# Altium PCB Knobber.PcbDoc
Units mm, origin at the board's own origin, x right, y up, seen from the top; angles counter-clockwise.
Board outline 32 x 31.45 mm, 4 copper layers (Top Layer, MidLayer1, MidLayer2, Bottom Layer), stack 1.57 mm thick; 60 components, 43 nets, 247 pads, 88 vias.
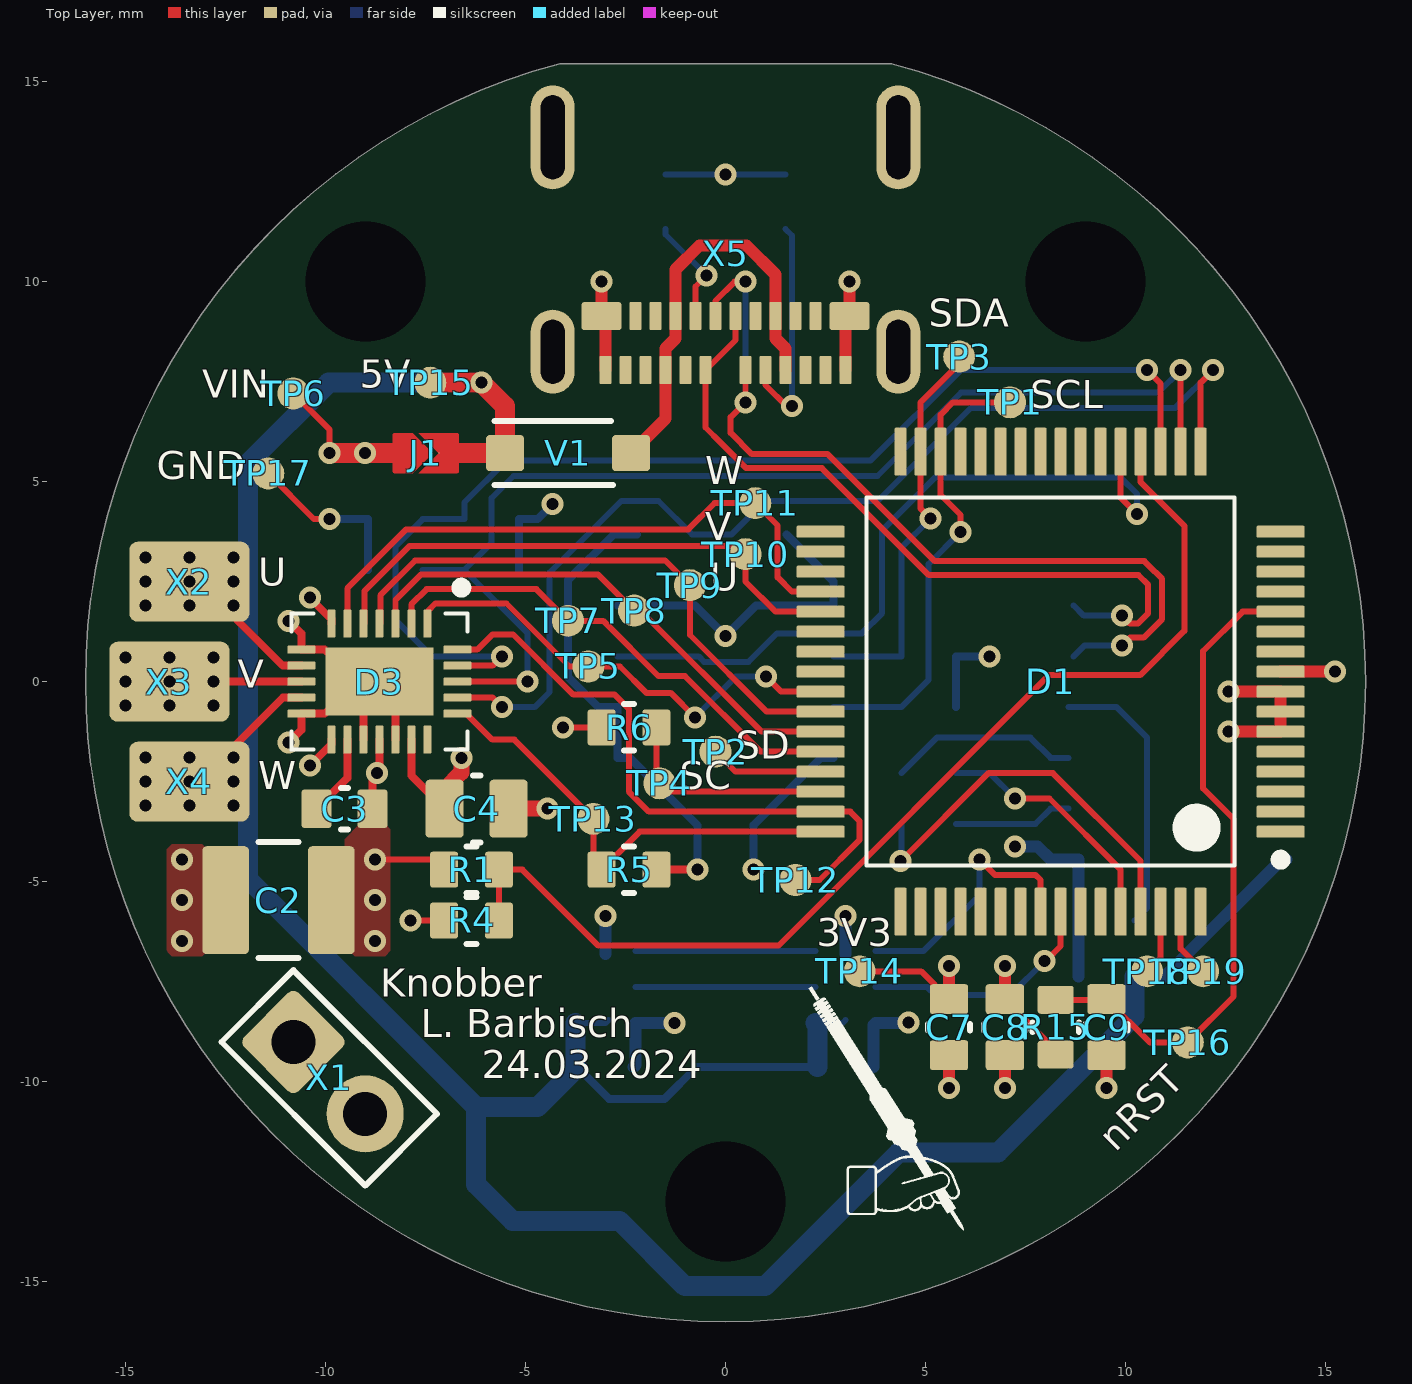
[diagram p0: Top Layer view]
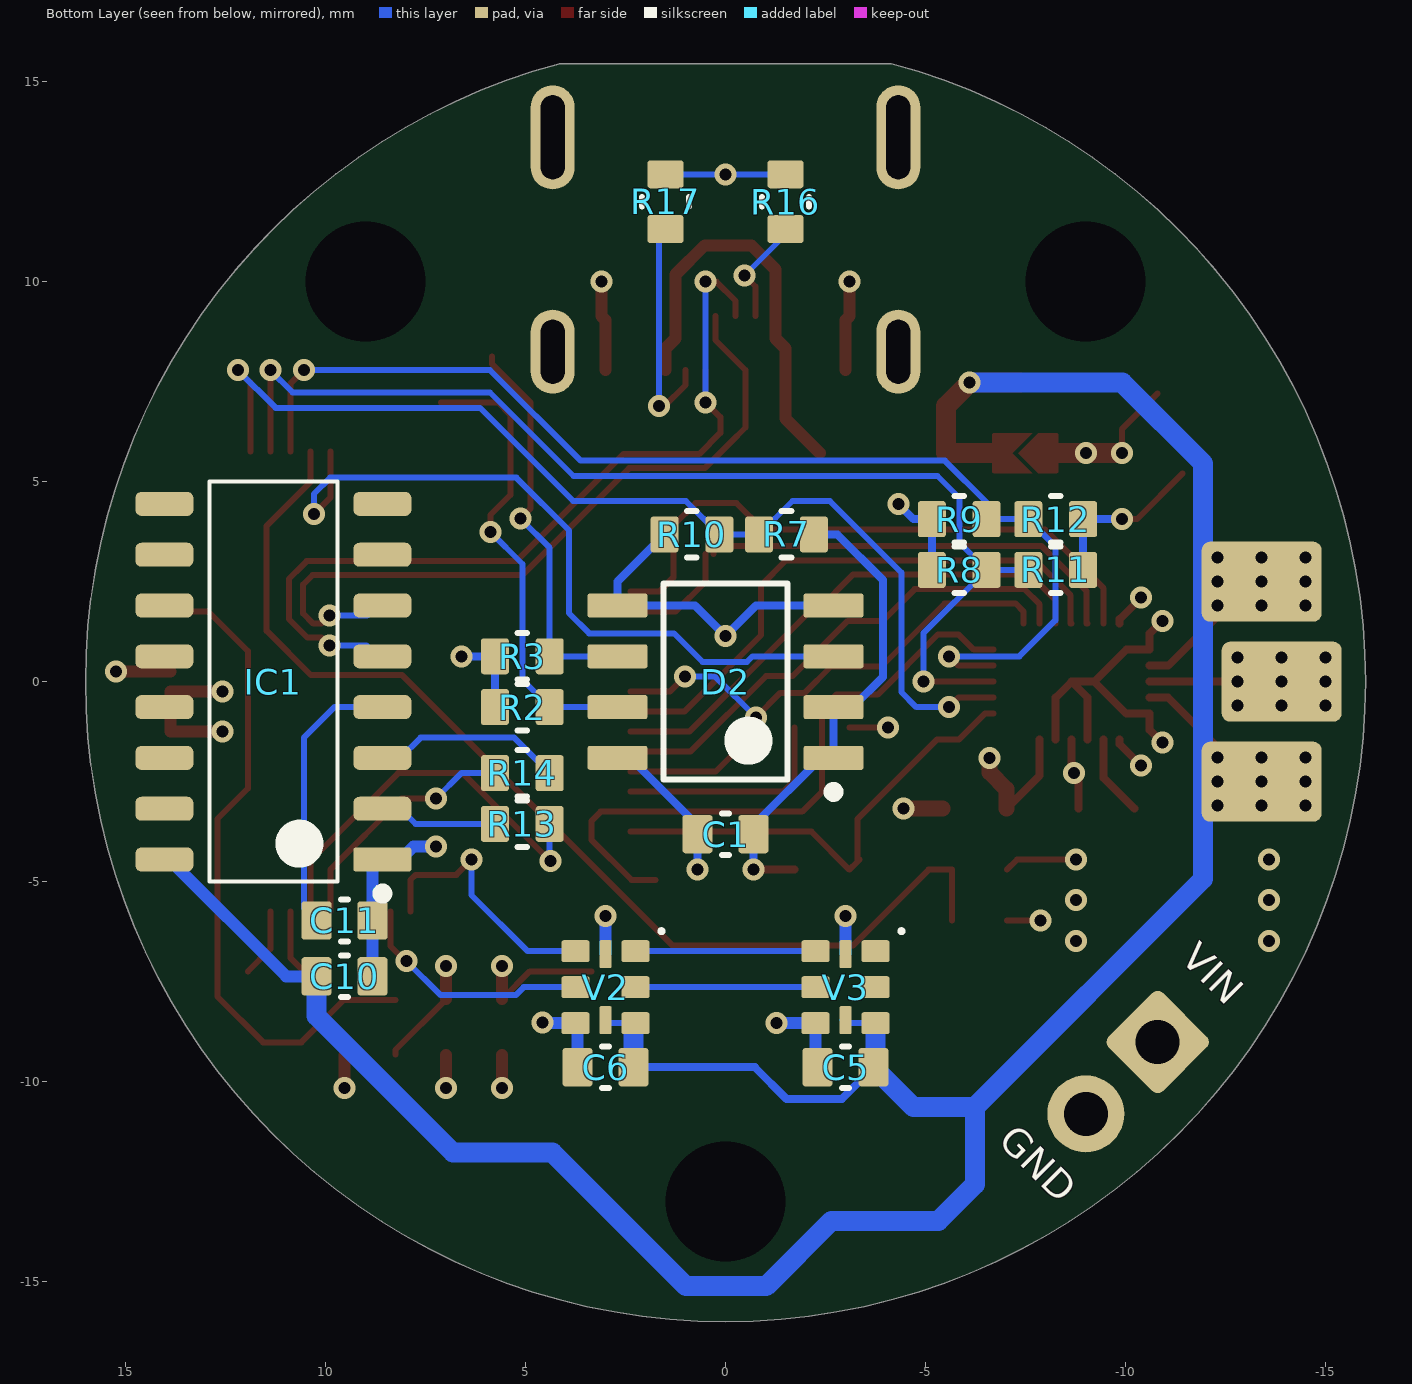
[diagram p1: Bottom Layer view, seen from below]
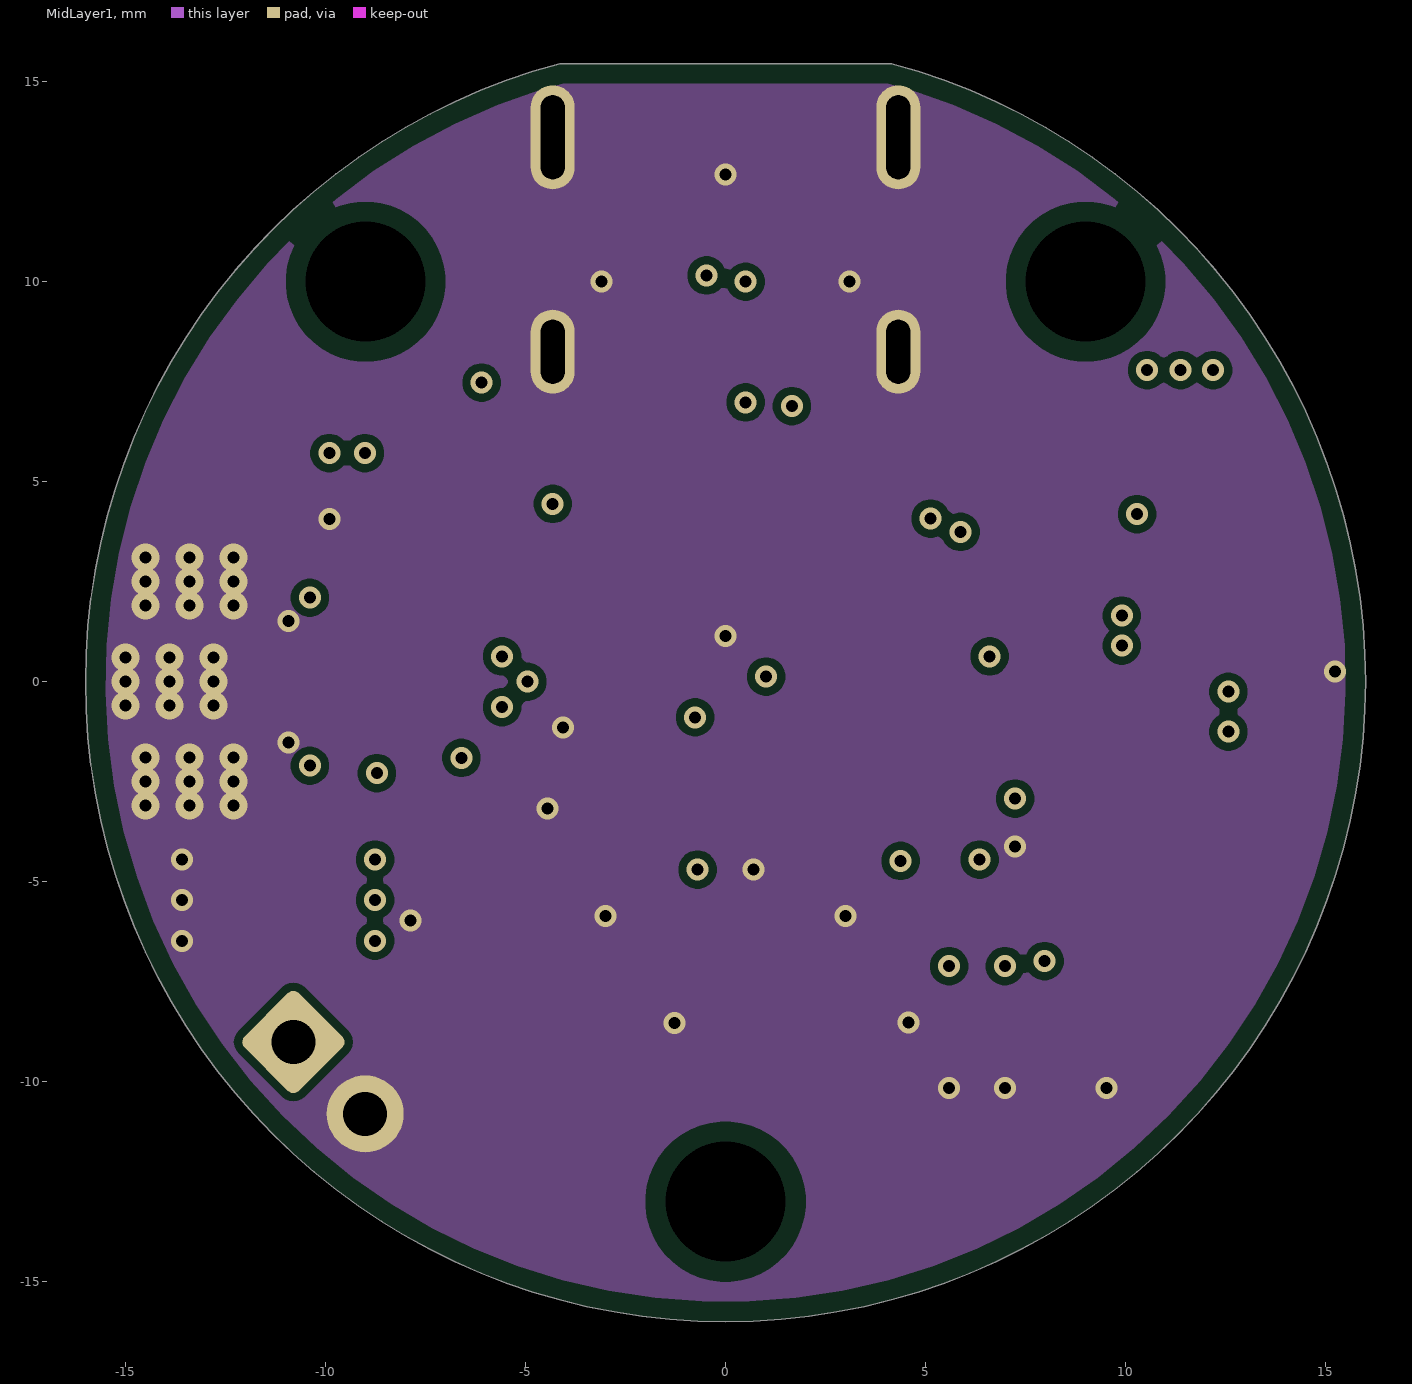
[diagram p2: MidLayer1]
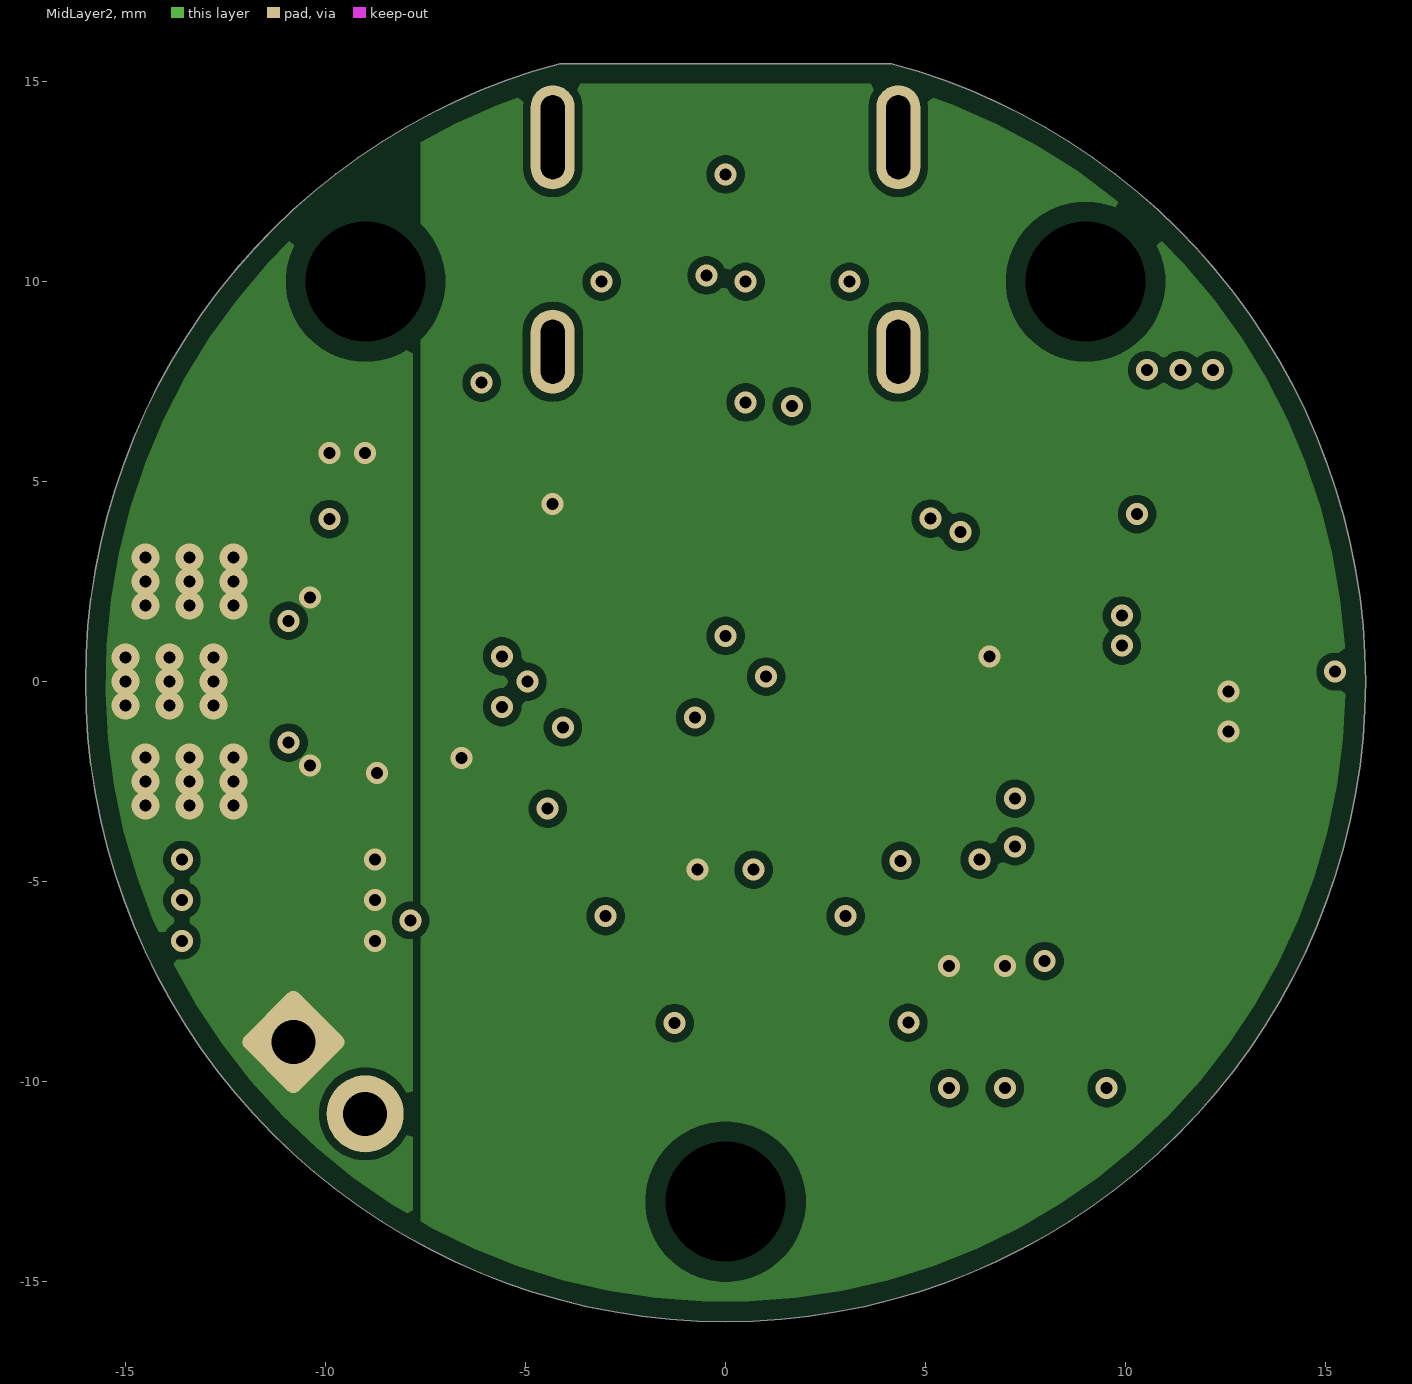
[diagram p3: MidLayer2]

## Layer stack, top to bottom
Top Solder: solder mask 0.01, Solder Resist, Dk 3.5
Top Layer: signal copper 0.035
Dielectric1: prepreg 0.18, FR-4 (7628), Dk 4.2
Dielectric 2: prepreg 0.18, FR-4 (7628), Dk 4.2
MidLayer1: signal copper 0.035
Core: core 0.71, Dk 4.2
MidLayer2: signal copper 0.035
Dielectric 3: prepreg 0.18, FR-4 (7628), Dk 4.2
Dielectric 4: prepreg 0.18, FR-4 (7628), Dk 4.2
Bottom Layer: signal copper 0.035
Bottom Solder: solder mask 0.01, Solder Resist, Dk 3.5

## Board outline
-4.141,15.455 ccw(c0,0) 4.141,15.455

## Design rules (kind name [scope] priority, off if disabled: settings)
AssemblyTestPointUsage [IsTestpoint] p1:
AssemblyTestpoint [IsTestpoint] p1 off: testpointundercomponent=TRUE minsize=0.8 maxsize=1.6 preferedsize=0.85 minholesize=0 maxholesize=0 preferedholesize=0 testpointgrid=0.025 usegrid=FALSE gridtolerance=0 allowsidetop=TRUE allowsidebottom=TRUE minspacing=2.54
BoardOutlineClearance [All and not OnLayer('Top Overlay')] p1: gap=0.5 ignorepadtopadclearanceinfootprint=FALSE except(0: Arc-SplitContinuation Track-SplitContinuation SMDPad-SplitContinuation Fill-SplitContinuation Poly-SplitContinuation Region-SplitContinuation Text-SplitContinuation; 1.5: THPad-SplitContinuation Via-SplitContinuation)
Clearance Clearance_NetClasses [InNetClass('PrimarySide') vs InNetClass('SecondarySide')] p1: gap=1 ignorepadtopadclearanceinfootprint=FALSE except(0: Arc-Hole Track-Hole SMDPad-Hole THPad-Hole Via-Hole Fill-Hole Poly-Hole Region-Hole Text-Hole)
Clearance Clearance_Pri-PE [InNetClass('PrimarySide') vs InNet('EARTH') or InNet('EARTH_G2') or InNet('EARTH_USB') or InNet('NetC3_2')] p2: gap=1 ignorepadtopadclearanceinfootprint=FALSE except(0: Arc-Hole Track-Hole SMDPad-Hole THPad-Hole Via-Hole Fill-Hole Poly-Hole Region-Hole Text-Hole)
Clearance Clearance_Sec-PE [InNetClass('SecondarySide') vs InNet('EARTH') or InNet('EARTH_G2') or InNet('EARTH_USB') or InNet('NetC3_2')] p3: gap=0.5 ignorepadtopadclearanceinfootprint=FALSE except(0: Arc-Hole Track-Hole SMDPad-Hole THPad-Hole Via-Hole Fill-Hole Poly-Hole Region-Hole Text-Hole)
Clearance Clearance_KeepOut [OnLayer('Keep-Out Layer')] p4: gap=0.5 ignorepadtopadclearanceinfootprint=FALSE except(0: Arc-Hole Track-Hole SMDPad-Hole THPad-Hole Via-Hole Fill-Hole Poly-Hole Region-Hole Text-Hole)
Clearance Clearance2Holes [not OnTopLayer AND NOT OnBottomLayer vs (ObjectKind = 'Pad') And (Layer = 'MultiLayer') And (PadIsPlated = 'False')] p5: gap=0.5 ignorepadtopadclearanceinfootprint=FALSE except(0: Arc-Hole Track-Hole SMDPad-Hole THPad-Hole Via-Hole Fill-Hole Poly-Hole Region-Hole Text-Hole)
Clearance Clearance_via2via [IsVia vs IsVia] p6: gap=0.15 ignorepadtopadclearanceinfootprint=FALSE
Clearance [All] p7: gap=0.2 ignorepadtopadclearanceinfootprint=FALSE except(0: Arc-Hole Track-Hole SMDPad-Hole THPad-Hole Via-Hole Fill-Hole Poly-Hole Region-Hole Text-Hole)
ComponentClearance [IsComponent] p1: gap=0.254 collisioncheckmode=3 verticalgap=0.254 showdistances=TRUE donotcheckwithout3dbody=TRUE
DiffPairsRouting [All] p1: maxlimit=0.254 minlimit=0.2 mostfreqgap=0.254 toplayer_minwidth=0.15 toplayer_maxwidth=0.381 toplayer_prefwidth=0.381 midlayer1_minwidth=0.15 midlayer1_maxwidth=0.381 midlayer1_prefwidth=0.381 midlayer2_minwidth=0.15 midlayer2_maxwidth=0.381 midlayer2_prefwidth=0.381 bottomlayer_minwidth=0.15 bottomlayer_maxwidth=0.381 bottomlayer_prefwidth=0.381 maxuncoupledlength=12.7
FabricationTestPointUsage [IsTestpoint] p1: valid=0 allowmultiple=FALSE
FabricationTestpoint [IsTestpoint] p1 off: side=3 testpointundercomponent=TRUE minsize=0.8 maxsize=1.6 preferedsize=0.85 minholesize=0 maxholesize=0 preferedholesize=0 testpointgrid=0.025 allowsidetop=TRUE allowsidebottom=TRUE usegrid=FALSE gridtolerance=0 minspacing=2.54 boardedgeclearance=1.9
HoleSize [All] p1: absolutevalues=TRUE maxlimit=6.4 minlimit=0.2 maxpercent=80.000 minpercent=20.000
MinimumAnnularRing MinimumAnnularRingVia [IsVia] p1: minimumring=0.12
MinimumAnnularRing MinimumAnnularRingDefault [All] p2: minimumring=0.15
MinimumSolderMaskSliver MinimumSolderMaskSliver_Symbols [IsComponent] p1: minsoldermaskwidth=0
MinimumSolderMaskSliver [All] p2: minsoldermaskwidth=0.1
PlaneClearance PlaneClearance_PE [InNet('EARTH_USB')  or InNet('EARTH_G2') or InNet('NetC3_2') or InNet('EARTH')] p1: clearance=1
PlaneClearance PlaneClearance_Holes-via [(IsVia)] p2: clearance=0.35
PlaneClearance PlaneClearance_Holes-Special [(InComponentClass('SpecialConnector'))] p3: clearance=0.35
PlaneClearance [All] p4: clearance=0.5
PlaneConnect "PlaneConnect_Special Con" [(InComponentClass('SpecialConnector'))] p1: planeconnectstyle=Direct reliefexpansion=0.508 reliefentries=4 reliefconductorwidth=0.254 reliefairgap=0.254
PlaneConnect PlaneConnect_Components [(InComponentClass('All Components'))] p2: planeconnectstyle=Relief reliefexpansion=0.35 reliefentries=4 reliefconductorwidth=0.25 reliefairgap=0.25
PlaneConnect [All] p3: planeconnectstyle=Direct reliefexpansion=0.508 reliefentries=4 reliefconductorwidth=0.254 reliefairgap=0.254
PolygonConnect PolygonConnect_Components [(InComponentClass('All Components'))] p1: connectstyle=Direct reliefconductorwidth=0.254 reliefentries=4 polygonreliefangle="90 Angle" airgapwidth=0.254
PolygonConnect [All] p2: connectstyle=Direct reliefconductorwidth=0.254 reliefentries=4 polygonreliefangle="90 Angle" airgapwidth=0.254
RoutingVias Micro-Vias [((ObjectKind = 'Via') AND (StartLayer = 'Top Layer') AND (StopLayer = 'InternalPlane1')) OR ((ObjectKind = 'Via') AND (StartLayer = 'Bottom Layer') AND (StopLayer = 'InternalPlane2'))] p1: holewidth=0.15 width=0.35 viastyle="Through Hole" minholewidth=0.15 minwidth=0.35 maxholewidth=0.15 maxwidth=0.35
RoutingVias [All] p2: holewidth=0.2 width=0.55 viastyle="Through Hole" minholewidth=0.2 minwidth=0.55 maxholewidth=0.3 maxwidth=0.7 useviatemplates=TRUE viatemplateguid#1={409902A1-507B-49B3-8F71-9776A71DEEE2} viatemplatename#1=v55h30m0mx0
SilkToSilkClearance [All] p1: silktosilkclearance=0.2
SilkToSolderMaskClearance SilkToPadClearance [IsPad] p1: minsilkscreentomaskgap=0.2 clearancetoexposedcopper=TRUE
SolderMaskExpansion SolderMaskExpansionVias [IsVia] p1: expansion=0.15 istentingtop=FALSE soldermaskfromhole=TRUE
SolderMaskExpansion SolderMaskExpansionHoles [(ObjectKind = 'Pad') And (PadIsPlated = 'False') And (AsMM(PadXSize_AllLayers) = 0) And (AsMM(PadYSize_AllLayers) = 0)] p2: expansion=0.05 istentingtop=FALSE soldermaskfromhole=TRUE
SolderMaskExpansion SolderMaskExpansionSTD [IsPad  Or IsRegion] p3: expansion=0.05 istentingtop=FALSE
ViasUnderSMD ViasUnderSMD_TP [HasFootprint('TP_1.0mm')] p1: allowed=TRUE
ViasUnderSMD [All] p2: allowed=FALSE
Width [All] p1: maxlimit=2 minlimit=0.15 preferedwidth=0.2 minimp=50.000000 maximp=50.000000 favimp=50.000000
18 further rules are at their usual default settings.

## Classes and differential pairs
component class Through-Hole_Assy: X1 X5
component class Testpoint: TP1 TP2 TP3 TP4 TP5 TP6 TP7 TP8 TP9 TP10 TP11 TP12 TP13 TP14 TP15 TP16 TP17 TP18 TP19 X2 X3 X4
component class Surface_Assy: C1 C2 C3 C4 C5 C6 C7 C8 C9 C10 C11 D1 D2 D3 IC1 J1 R1 R2 R3 R4 R5 R6 R7 R8 R9 R10 R11 R12 R13 R14 R15 R16 R17 V1 V2 V3
differential pair D: +D_P -D_N

## Components (designator, comment, footprint, x,y, rotation, side; value= is the part's Value field where it differs from the comment)
C1 "Cap 1u 0603" C-0603_1608_095_L_RF 0,-3.81 r180 bottom value=1µF
C2 "CAP 10u 1210" C-1210_3225_230_L_RF -11.176,-5.461 r0 top value=10µF
C3 "Cap 1u 0603" C-0603_1608_095_L_RF -9.525,-3.175 r0 top value=1µF
C4 "CAP 10u 16V 0805" C-0805_2012_145_L_RF -6.223,-3.175 r180 top value=10µF
C5 "Cap 100n 0603" C-0603_1608_095_L_RF -3,-9.637 r180 bottom value=100nF
C6 "Cap 100n 0603" C-0603_1608_095_L_RF 3,-9.637 r180 bottom value=100nF
C7 "Cap 100n 0603" C-0603_1608_095_L_RF 5.588,-8.636 r90 top value=100nF
C8 "Cap 1u 0603" C-0603_1608_095_L_RF 6.985,-8.636 r90 top value=1µF
C9 "Cap 100n 0603" C-0603_1608_095_L_RF 9.525,-8.636 r90 top value=100nF
C10 "Cap 100n 0603" C-0603_1608_095_L_RF 9.525,-7.366 r0 bottom value=100nF
C11 "Cap 100n 0603" C-0603_1608_095_L_RF 9.525,-5.969 r0 bottom value=100nF
D1 "STM32G070RBT6" LQFP64_50P1200X1200X160-64N 8.128,0 r180 top
D2 "AS5600" SOIC8_N_RF 0,0 r0 bottom
D3 "MP6543HGL" QFN24_5x7_N_RF -8.655,0 r270 top
IC1 "CH340" SOIC16_N_RF 11.303,0 r0 bottom
J1 "Solder jumper 2Pin" J-1206_Solderjumper_2Pin -7.493,5.715 r0 top value=Jumper
R1 "Res 10k 0603" R-0603_1608_050_L_RF -6.35,-4.699 r180 top value=10k
R2 "Res 4k7 0603" R-0603_1608_050_L_RF 5.08,-0.635 r0 bottom value=4.7k
R3 "Res 4k7 0603" R-0603_1608_050_L_RF 5.08,0.635 r0 bottom value=4.7k
R4 "Res 1k 0603" R-0603_1608_050_L_RF -6.35,-5.969 r0 top value=1k
R5 "Res 10k 0603" R-0603_1608_050_L_RF -2.413,-4.699 r0 top value=10k
R6 "Res 10k 0603" R-0603_1608_050_L_RF -2.413,-1.143 r0 top value=10k
R7 "Res 10k 0603" R-0603_1608_050_L_RF -1.524,3.683 r180 bottom value=10k
R8 "Res 10k 0603" R-0603_1608_050_L_RF -5.842,2.794 r0 bottom value=10k
R9 "Res 10k 0603" R-0603_1608_050_L_RF -5.842,4.064 r0 bottom value=10k
R10 "Res 10k 0603" R-0603_1608_050_L_RF 0.839,3.683 r180 bottom value=10k
R11 "Res 10k 0603" R-0603_1608_050_L_RF -8.255,2.794 r0 bottom value=10k
R12 "Res 10k 0603" R-0603_1608_050_L_RF -8.255,4.064 r0 bottom value=10k
R13 "Res 100R 0603" R-0603_1608_050_L_RF 5.08,-3.556 r180 bottom value=100
R14 "Res 100R 0603" R-0603_1608_050_L_RF 5.08,-2.286 r0 bottom value=100
R15 "Res 10k 0603" R-0603_1608_050_L_RF 8.255,-8.636 r90 top value=10k
R16 "Res 5k1 0603" R-0603_1608_050_L_RF -1.5,12 r270 bottom value=5.1k
R17 "Res 5k1 0603" R-0603_1608_050_L_RF 1.5,12 r270 bottom value=5.1k
TP1 "TestPoint 0.8mm" TP_0.8mm 7.112,6.985 r90 top value=TP
TP2 "TestPoint 0.8mm" TP_0.8mm -0.25,-1.75 r0 top value=TP
TP3 "TestPoint 0.8mm" TP_0.8mm 5.842,8.128 r90 top value=TP
TP4 "TestPoint 0.8mm" TP_0.8mm -1.651,-2.54 r0 top value=TP
TP5 "TestPoint 0.8mm" TP_0.8mm -3.429,0.381 r90 top value=TP
TP6 "TestPoint 0.8mm" TP_0.8mm -10.804,7.207 r90 top value=TP
TP7 "TestPoint 0.8mm" TP_0.8mm -3.937,1.524 r90 top value=TP
TP8 "TestPoint 0.8mm" TP_0.8mm -2.286,1.778 r90 top value=TP
TP9 "TestPoint 0.8mm" TP_0.8mm -0.889,2.413 r90 top value=TP
TP10 "TestPoint 0.8mm" TP_0.8mm 0.5,3.189 r90 top value=TP
TP11 "TestPoint 0.8mm" TP_0.8mm 0.745,4.463 r90 top value=TP
TP12 "TestPoint 0.8mm" TP_0.8mm 1.75,-4.957 r90 top value=TP
TP13 "TestPoint 0.8mm" TP_0.8mm -3.302,-3.429 r90 top value=TP
TP14 "TestPoint 0.8mm" TP_0.8mm 3.354,-7.239 r90 top value=TP
TP15 "TestPoint 0.8mm" TP_0.8mm -7.378,7.476 r0 top value=TP
TP16 "TestPoint 0.8mm" TP_0.8mm 11.557,-9.017 r0 top value=TP
TP17 "TestPoint 0.8mm" TP_0.8mm -11.43,5.207 r0 top value=TP
TP18 "TestPoint 0.8mm" TP_0.8mm 10.541,-7.239 r0 top value=TP
TP19 "TestPoint 0.8mm" TP_0.8mm 11.938,-7.239 r0 top value=TP
V1 "MBR0520L" SOD123_L_RF -3.937,5.715 r180 top
V2 "APA102C" V_2020_P6_N_RF 3,-7.637 r0 bottom
V3 "APA102C" V_2020_P6_N_RF -3,-7.637 r0 bottom
X1 "CONN HEADER 2POS 1ROW THT 2.54MM" X-0508X0254_R_WE_61300211121 -9.906,-9.906 r315 top value=61300211121
X2 "" LöTPAD_2X3 -13.405,2.5 r90 top
X3 "" LöTPAD_2X3 -13.905,0 r90 top
X4 "" LöTPAD_2X3 -13.405,-2.5 r90 top
X5 "105450-0101" 105450-0101 0,8.25 r180 top

## Footprints (in the part's own frame and the unit in brackets; to place one, negate y for a bottom-side part, rotate by r counter-clockwise, add the part's x,y. Pads: shape width x height; smd on the part's side, far side on the other; paste and mask are expansions set on the pad)
105450-0101 [mm] "USB-C Connector"
  rrect20% 0.3x0.7 smd: A1(-3,0.46) A2(-2.5,0.46) A3(-2,0.46) A4(-1.5,0.46) A5(-1,0.46) A6(-0.5,0.46) A7(0.5,0.46) A8(1,0.46) A9(1.5,0.46) A10(2,0.46) A11(2.5,0.46) A12(3,0.46) B2(2.25,-0.89) B3(1.75,-0.89) B4(1.25,-0.89) B5(0.75,-0.89) B6(0.25,-0.89) B7(-0.25,-0.89) B8(-0.75,-0.89) B9(-1.25,-0.89) B10(-1.75,-0.89) B11(-2.25,-0.89)
  rrect20% 1x0.7 smd mask+0.15: B1(3.1,-0.89) B12(-3.1,-0.89)
  oval 1.1x2.1 hole 0.6 slot 1.6 at 90 deg mask+0.102: S(-4.32,0) S(4.32,0)
  oval 1.1x2.6 hole 0.6 slot 2.1 at 90 deg: S(-4.32,-5.36) S(4.32,-5.36)
  body extent -4.47,-7.3 4.47,0.6, height 3.18
C-0603_1608_095_L_RF [mm] "Capacitor Chip 0603 Reflow; IPC7351C; Least; A.0"
  rrect20% 0.75x0.96 smd: 1(-0.7,0) 2(0.7,0)
  silkscreen extent -0.08,-0.52 0.08,0.52, body extent -0.87,-0.48 0.88,0.48, height 0.95
C-0805_2012_145_L_RF [mm] "Capacitor Chip 0805 Reflow; IPC7351C; Least; A.0"
  rrect20% 0.95x1.45 smd: 1(-0.8,0) 2(0.8,0)
  silkscreen extent -0.09,-0.83 0.09,0.84, body extent -1.1,-0.72 1.11,0.73, height 1.45
C-1210_3225_230_L_RF [mm] "Capacitor Chip 1210 Reflow; IPC7351C; Least; A.1"
  rrect20% 1.17x2.7 smd: 1(-1.32,0) 2(1.32,0)
  silkscreen extent -0.5,-1.45 0.5,1.45, body extent -1.7,-1.35 1.7,1.35, height 2.3
J-1206_Solderjumper_2Pin [mil] "SolderJumper 2Pin"
  round 1 smd paste-99999 mask+1.18: 1(-12.8,0) 2(12.8,0)
  Top Layer region: -32.48,-17.72 -32.48,17.72 -32.33,18.47 -31.9,19.11 -31.27,19.53 -30.51,19.68 -30.51,19.69 -12.8,19.69 6.89,0 -12.8,-19.69 -30.51,-19.69 -31.27,-19.54 -31.9,-19.11 -32.33,-18.47 -32.48,-17.72
  Top Layer region: 32.48,-17.72 32.48,17.72 32.33,18.47 31.9,19.11 31.27,19.53 30.51,19.68 30.51,19.69 -6.89,19.69 12.8,0 -6.89,-19.69 30.51,-19.69 31.26,-19.54 31.9,-19.11 32.33,-18.47 32.48,-17.72
LQFP64_50P1200X1200X160-64N [mm] "LQFP, 64-Leads, Body 10.00x10.00mm, Pitch 0.50mm, IPC Medium Density"
  rrect20% 1.2x0.3 smd: 1(-5.75,3.75) 2(-5.75,3.25) 3(-5.75,2.75) 4(-5.75,2.25) 5(-5.75,1.75) 6(-5.75,1.25) 7(-5.75,0.75) 8(-5.75,0.25) 9(-5.75,-0.25) 10(-5.75,-0.75) 11(-5.75,-1.25) 12(-5.75,-1.75) 13(-5.75,-2.25) 14(-5.75,-2.75) 15(-5.75,-3.25) 16(-5.75,-3.75) 33(5.75,-3.75) 34(5.75,-3.25) 35(5.75,-2.75) 36(5.75,-2.25) 37(5.75,-1.75) 38(5.75,-1.25) 39(5.75,-0.75) 40(5.75,-0.25) 41(5.75,0.25) 42(5.75,0.75) 43(5.75,1.25) 44(5.75,1.75) 45(5.75,2.25) 46(5.75,2.75) 47(5.75,3.25) 48(5.75,3.75)
  rrect20% 0.3x1.2 smd: 17(-3.75,-5.75) 18(-3.25,-5.75) 19(-2.75,-5.75) 20(-2.25,-5.75) 21(-1.75,-5.75) 22(-1.25,-5.75) 23(-0.75,-5.75) 24(-0.25,-5.75) 25(0.25,-5.75) 26(0.75,-5.75) 27(1.25,-5.75) 28(1.75,-5.75) 29(2.25,-5.75) 30(2.75,-5.75) 31(3.25,-5.75) 32(3.75,-5.75) 49(3.75,5.75) 50(3.25,5.75) 51(2.75,5.75) 52(2.25,5.75) 53(1.75,5.75) 54(1.25,5.75) 55(0.75,5.75) 56(0.25,5.75) 57(-0.25,5.75) 58(-0.75,5.75) 59(-1.25,5.75) 60(-1.75,5.75) 61(-2.25,5.75) 62(-2.75,5.75) 63(-3.25,5.75) 64(-3.75,5.75)
  silkscreen extent -5.88,-4.6 4.6,4.6, body extent -6.01,-6.01 6.01,6.01, height 1.6
LöTPAD_2X3 [mm]
  rrect20% 2x3 smd: 1(0,0)
  rrect20% 2x3 smd far side: 1(0,0)
QFN24_5x7_N_RF [mm] "QFN, 24-Leads, Body 3.00x4.00mm, Pitch 0.40mm, Thermal Pad 1.70x2.70mm, IPC Medium Density"
  rrect20% 0.7x0.2 smd: 1(-1.45,1.2) 2(-1.45,0.8) 3(-1.45,0.4) 4(-1.45,0) 5(-1.45,-0.4) 6(-1.45,-0.8) 7(-1.45,-1.2) 13(1.45,-1.2) 14(1.45,-0.8) 15(1.45,-0.4) 16(1.45,0) 17(1.45,0.4) 18(1.45,0.8) 19(1.45,1.2)
  rrect20% 0.2x0.7 smd: 8(-0.8,-1.95) 9(-0.4,-1.95) 10(0,-1.95) 11(0.4,-1.95) 12(0.8,-1.95) 20(0.8,1.95) 21(0.4,1.95) 22(0,1.95) 23(-0.4,1.95) 24(-0.8,1.95)
  rect 1.7x2.7 smd: 25(0,0)
  silkscreen extent -2.47,-2.2 1.7,2.2, body extent -1.55,-2.05 1.55,2.05, height 1
R-0603_1608_050_L_RF [mm] "Resistor Chip 0603 Reflow; IPC7351C; Least; A.1"
  rrect20% 0.7x0.9 smd: 1(-0.685,0) 2(0.685,0)
  silkscreen extent -0.12,-0.58 0.12,0.58, body extent -0.85,-0.45 0.85,0.45, height 0.5
SOD123_L_RF [mm] "SOD123"
  rrect20% 0.95x0.9 smd mask+0.05: 1(-1.575,0) 2(1.575,0)
  silkscreen extent -1.12,-0.8 1.84,0.8, body extent -1.85,-0.78 1.85,0.77, height 1.35
SOIC8_N_RF [mm] "SOIC, 8-Leads, Body 4.90x3.90mm, Pitch 1.27mm, IPC Medium Density"
  rrect20% 1.5x0.6 smd: 1(-2.7,1.905) 2(-2.7,0.635) 3(-2.7,-0.635) 4(-2.7,-1.905) 5(2.7,-1.905) 6(2.7,-0.635) 7(2.7,0.635) 8(2.7,1.905)
  silkscreen extent -2.82,-2.45 1.55,2.88, body extent -3,-2.45 3,2.45, height 1.75
SOIC16_N_RF [mm] "SOIC, 16-Leads, Body 9.90x3.90mm, Pitch 1.27mm, IPC Medium Density"
  rrect20% 1.45x0.6 smd: 1(-2.725,4.445)
  rrect50% 1.45x0.6 smd: 2(-2.725,3.175) 3(-2.725,1.905) 4(-2.725,0.635) 5(-2.725,-0.635) 6(-2.725,-1.905) 7(-2.725,-3.175) 8(-2.725,-4.445) 9(2.725,-4.445) 10(2.725,-3.175) 11(2.725,-1.905) 12(2.725,-0.635) 13(2.725,0.635) 14(2.725,1.905) 15(2.725,3.175) 16(2.725,4.445)
  silkscreen extent -2.85,-5 1.6,5.42, body extent -3,-5 3,5, height 1.75
TP_0.8mm [mm] "Testpoint 0.8mm"
  round 0.8 smd paste-0.5: 1(0,0)
V_2020_P6_N_RF [mm] "APA102C LED"
  rrect20% 0.7x0.55 smd mask+0.05: 1(-0.75,0) 2(-0.75,0.9) 3(0.75,0) 4(-0.75,-0.9) 5(0.75,0.9) 6(0.75,-0.9)
  rrect20% 0.3x0.7 smd mask+0.05: 2(0,0.825) 5(0,-0.825)
  silkscreen extent -1.45,-1.45 -1.35,-1.35, body extent -1,-1 1,1, height 0.6
X-0508X0254_R_WE_61300211121 [mm] "Pin Header; 2.54mm, WE"
  rrect20% 1.925x1.925 hole 1.1: 1(-1.27,0)
  round 1.925 hole 1.1: 2(1.27,0)
  silkscreen extent -2.54,-1.27 2.54,1.27, body extent -2.54,-1.27 2.54,1.27, height 8.57

## Part data
C1 C3 C8: library part CMP-001-0045-3, "Cap Cer SMD 1u 16V 10% 0603 X7R", Case / Package=0603, Manufacturer=AVX, Manufacturer 2=KEMET, Manufacturer Part Number=0603YC105KAT2A, Manufacturer Part Number 2=C0603C105K4RACTU, ClassName=Surface_Assy, GPV_Number=1749.0125, PartStatus=Release, Prefered=true, Technology=SMT, User=epph
C2: library part CMP-001-0198-2, "CAP CER 10uF 50V X7S 1210", Case / Package=1210, Manufacturer=TDK, Manufacturer Part Number=C3225X7S1H106K250AE, ClassName=Surface_Assy, ComponentLink1Description=Datasheet, ComponentLink1URL=https://datasheet.ciiva.com/24218/c3225x7s1h106k250ae-265440-24218657.pdf?src-supplier=Mouser, GPV_Number=1752.0100, PartStatus=Release, Technology=SMT, User=zupa
C4: library part CMP-001-0177-2, "Cap Cer SMD 10u 16V 10% 0805 X5R", Case / Package=0805, Manufacturer=AVX, Manufacturer Part Number=0805YD106KAT2A, ClassName=Surface_Assy, ComponentLink1Description=Datasheet, ComponentLink1URL=https://datasheet.ciiva.com/152/cx5r-152114.pdf, GPV_Number=1750.0241, PartStatus=Release, Prefered=true, Technology=SMT, User=zupa
C5 C6 C7 C9 C10 C11: library part CMP-001-0036-2, "Cap Cer SMD 100n 100V 10% 0603 X7R", Case / Package=0603, Manufacturer=MURATA, Manufacturer Part Number=GRM188R72A104KA35, ClassName=Surface_Assy, ComponentLink1Description=Datasheet, ComponentLink1URL=https://datasheet.ciiva.com/34302/1857815-34302863.pdf, GPV_Number=1749.0196, PartStatus=Release, Prefered=false, Technology=SMT, User=zupa
D1: "IC MCU Cortex M0+ 128k Flash, 36k RAM, 64MHz", Case/Package=QFP64, Manufacturer=ST, ClassName=Surface_Assy, Footprint_validated=No, GPV_Number=xxxx.xxxx, Manufacturer Part Number=STM32G070RBT6, MNL_Number=xxxxxxxx, Part_validated=No, PartStatus=New, System=-, Technology=SMT
D2: "IC Sensor Rotation Magnet 12bit", Case/Package=SO-8, Manufacturer=AMS, ClassName=Surface_Assy, Footprint_validated=No, GPV_Number=xxxx.xxxx, Manufacturer Part Number=AS5600, MNL_Number=xxxxxxxx, Part_validated=No, PartStatus=New, System=-, Technology=SMT
D3: library part MP6543HGL-A-P, "Motor Driver 3-Phase 3-22V 2A", Case/Package=QFN-24, Manufacturer="Monolithic Power Systems", ClassName=Surface_Assy, Footprint_validated=No, GPV_Number=xxxx.xxxx, Manufacturer Part Number=MP6543HGL-A-P, MNL_Number=xxxxxxxx, Part_validated=No, PartStatus=New, System=-, Technology=SMT
IC1: library part CH340C, "IC Converter USB UART", Case/Package=SO16, Manufacturer=WCN, ClassName=Surface_Assy, Footprint_validated=No, GPV_Number=xxxx.xxxx, Manufacturer Part Number=CH340C, MNL_Number=xxxxxxxx, Part_validated=No, PartStatus=New, System=-, Technology=SMT
J1: library part CMP-00136-2, ClassName=Surface_Assy, PartStatus=Release, Technology=SYM, User=epph
R1 R5 R6 R7 R8 R9 R10 R11 R12 R15: library part CMP-001-0241-3, "Res SMD 10k 1% 0.1W 0603", Case / Package=0603, Manufacturer=YAGEO, Manufacturer Part Number=RC0603FR-0710KL, ClassName=Surface_Assy, ComponentLink1Description=Datasheet, ComponentLink1URL=https://datasheet.ciiva.com/11808/0900766b80f96399-11808280.pdf, GPV_Number=1922.0100, MNL_Number=15310022, PartStatus=Release, Prefered=true, Technology=SMT, User=zupa
R2 R3: library part CMP-001-0274-3, "Res SMD 4k7 1% 0.1W 0603", Case / Package=0603, Manufacturer=YAGEO, Manufacturer Part Number=RC0603FR-074K7L, ClassName=Surface_Assy, ComponentLink1Description=Datasheet, ComponentLink1URL=https://datasheet.ciiva.com/11808/0900766b80f96399-11808280.pdf, GPV_Number=1922.0017, MNL_Number=15347012, PartStatus=Release, Prefered=true, Technology=SMT, User=zupa
R4: library part CMP-001-0250-3, "Res SMD 1k 1% 0.1W 0603", Case / Package=0603, Manufacturer=YAGEO, Manufacturer Part Number=RC0603FR-071KL, ClassName=Surface_Assy, ComponentLink1Description=Datasheet, ComponentLink1URL=https://datasheet.ciiva.com/11808/0900766b80f96399-11808280.pdf, GPV_Number=1922.0011, MNL_Number=15310012, PartStatus=Release, Prefered=true, Technology=SMT, User=zupa
R13 R14: library part CMP-001-0240-3, "Res SMD 100R 1% 0.1W 0603", Case / Package=0603, Manufacturer=YAGEO, Manufacturer Part Number=RC0603FR-07100RL, ClassName=Surface_Assy, ComponentLink1Description=Datasheet, ComponentLink1URL=https://datasheet.ciiva.com/11808/0900766b80f96399-11808280.pdf, GPV_Number=1922.0102, MNL_Number=15310004, PartStatus=Release, Prefered=true, Technology=SMT, User=zupa
R16 R17: library part CMP-001-0582-3, "Res SMD 5k1 1% 0.1W 0603", Case / Package=0603, Manufacturer=YAGEO, Manufacturer Part Number=RC0603FR-075K1L, ClassName=Surface_Assy, ComponentLink1Description=Datasheet, ComponentLink1URL=https://datasheet.ciiva.com/8895/pyu-rc0603-51-rohs-l-4-8895189.pdf, GPV_Number=1922.0144, PartStatus=Release, Prefered=true, Technology=SMT, User=napa
TP1 TP2 TP3 TP4 TP5 TP6 TP7 TP8 TP9 TP10 TP11 TP12 TP13 TP14 TP15 TP16 TP17 TP18 TP19: library part CMP-001-1515-1, ClassName=Testpoint, GPV_Number=-, PartStatus=Release, Technology=SMT, User=zupa
V1: library part CMP-001-1324-3, "Diode Schottky 20V 0.5A SOD123", Case / Package=SOD123, Manufacturer=ONSemi, Manufacturer Part Number=MBR0520LT1G, ClassName=Surface_Assy, GPV_Number=1600.2395, PartStatus=Release, Prefered=false, Technology=SMT, User=epph
V2 V3: "RGB LED SPI Interface", Case/Package=2020, Manufacturer="APA Electronic CO", Manufacturer Part Number=APA-102-2020-256-8A, ClassName=Surface_Assy, Footprint_validated=No, GPV_Number=xxxx.xxxx, MNL_Number=xxxxxxxx, Part_validated=No, PartStatus=New, System=-, Technology=SMT
X1: library part CMP-00105-2, "CONN HEADER 2POS 1ROW THT 2.54MM WE 61300211121", Manufacturer=WE, Manufacturer Part Number=61300211121, ClassName=Through-Hole_Assy, ComponentLink1Description=Datasheet, ComponentLink1URL=https://www.we-online.com/katalog/datasheet/6130xx11121.pdf, PartStatus=Release, System=Connector, Technology=THT, User=balu
X2 X3 X4: library part Lötpad_2mmx3mm, "Solderpad 2mm x 3mm", Case/Package=-, ClassName=Testpoint, Footprint_validated=No, GPV_Number=xxxx.xxxx, Manufacturer=-, Manufacturer Part Number=-, MNL_Number=xxxxxxxx, Part_validated=No, PartStatus=New, System=Connector, Technology=SMT
X5: "CONN USB-C 16pin", Case/Package=USB-C, Manufacturer=Molex, ClassName=Through-Hole_Assy, Footprint_validated=No, GPV_Number=xxxx.xxxx, Manufacturer Part Number=105450-0101, MNL_Number=xxxxxxxx, Part_validated=No, PartStatus=New, System=Connector, Technology=SMT

## Free pads (board coordinates)
  round 0 hole 3 unplated: 7(-9,10) 7(9,10) 9(0,-13)

## Via types
v1: diameter 0.55, hole 0.3, Top Layer to Bottom Layer, tented both sides, 61 vias
v2: diameter 0.7, hole 0.3, Top Layer to Bottom Layer, tented both sides, 27 vias

## Nets (pads, with @x,y where several pads share a name; then routed paths per layer and width w, separated by ;. In a path a pad name is that pad's centre, name@x,y a point inside that pad or via, vN(x,y) a via of type N, cw(c..) or ccw(c..) an arc to the next point about the centre after c; other vN are vias at no path point)
+3V3: C1.2 C4.2 C7.2 C8.2 D1.6 D1.7 D1.8 D2.1 D2.2 D3.18 R2.2 R3.2 R5.2 R7.2 R8.2 R9.2 R15.1 TP14.1 | length 29.9
  Top Layer w0.15: TP14.1 4.891,-7.239 C7.2 ; C8.2 8.255,-9.206 R15.1
  Top Layer w0.2: D3.18 -7.855,-2.343 C4.2 ; R5.2 v1(-0.7,-4.699)
  Top Layer w0.3: C7.2 v1(5.588,-7.112) ; C8.2 v1(6.985,-7.112) ; v1(12.573,-1.25) D1.6 D1.7 D1.8 v1(12.573,-0.25)
  Top Layer w0.4: C4.2 -7.023,-2.685 -6.604,-2.266 v1(-6.604,-1.905)
  Bottom Layer w0.2: R8.2 R9.2 -4.701,4.064 v1(-4.32,4.445) ; R7.2 -2.794,3.683 -3.937,2.54 -3.937,0.121 -3.181,-0.635 D2.2 D2.1 -2.384,-1.905 -0.7,-3.589 C1.2 v1(-0.7,-4.699) ; R2.2 R3.2 v1(6.604,0.635)
+5V: C5.2 C6.2 C10.2 IC1.16 J1.2 TP15.1 V1.2 V2.2 V3.2 | length 71.3
  Top Layer w0.5: TP15.1 v1(-6.099,7.476) -5.512,6.889 V1.2 -6.768,5.715
  Bottom Layer w0.15: V3.2@-3.675,-8.537 -3,-8.537 V3.2@-2.925,-8.462 ; V2.2@2.25,-8.537 2.925,-8.537 V2.2@3,-8.462
  Bottom Layer w0.2: C5.2 -2.907,-10.43 -1.524,-10.43 -0.731,-9.637 C6.2
  Bottom Layer w0.3: C10.2 10.984,-7.366 13.905,-4.445 IC1.16
  Bottom Layer w0.5: v1(-6.099,7.476) -9.921,7.476 -11.938,5.459 -11.938,-4.931 -6.232,-10.637 ; V3.2@-3.75,-8.537 -3.75,-9.587 C5.2 -4.7,-10.637 -6.232,-10.637 ; V2.2@2.25,-8.537 2.3,-8.587 C6.2 ; C10.2 10.225,-8.358 6.81,-11.772 4.329,-11.772 0.989,-15.113 -1.016,-15.113 -2.652,-13.477 -5.327,-13.477 -6.232,-12.571 -6.232,-10.637
ADC_Angle: D1.21 D2.3 | length 18.6
  Top Layer w0.15: D1.21 9.878,4.6 v1(10.287,4.191)
  Bottom Layer w0.15: D2.3 -0.674,0.635 -0.532,0.493 0.569,0.493 1.282,1.206 1.867,1.206 1.871,1.21 3.409,1.21 3.914,1.716 3.914,3.784 5.231,5.101 9.885,5.101 10.287,4.699 v1(10.287,4.191)
ADC_I_U: D1.17 D3.21 R7.1 R10.2 | length 27.1
  Top Layer w0.15: D3.21 -5.823,-0.4 v1(-5.588,-0.635) ; D1.17 11.878,7.476 v1(12.192,7.79)
  Bottom Layer w0.15: v1(-5.588,-0.635) -4.771,-0.635 -4.394,-0.258 -4.394,2.73 -2.606,4.519 -1.675,4.519 R7.1 R10.2 0.99,4.519 3.81,4.519 6.137,6.846 11.248,6.846 v1(12.192,7.79)
ADC_I_V: D1.18 D3.22 R8.1 R11.2 | length 28.9
  Top Layer w0.15: D3.22 v1(-4.953,0) ; D1.18 v1(11.378,7.79)
  Bottom Layer w0.15: R11.2 R8.1 ; v1(-4.953,0) -4.953,1.22 R8.1 ; v1(11.378,7.79) 10.82,7.232 5.889,7.232 3.799,5.142 -5.3,5.142 -5.848,4.594 -5.848,3.473 R8.1
ADC_I_W: D1.19 D3.23 R9.1 R12.2 | length 29.1
  Top Layer w0.15: D3.23 -5.823,0.4 v1(-5.588,0.635) ; v1(10.541,7.79) 10.878,7.453 D1.19
  Bottom Layer w0.15: v1(-5.588,0.635) -7.348,0.635 -8.248,1.535 -8.248,3.386 R12.2 R9.1 -6.527,4.48 -5.482,5.525 3.622,5.525 5.887,7.79 v1(10.541,7.79)
ADC_VIN: D1.20 R1.1 R4.2 | length 27.4
  Top Layer w0.15: R4.2 R1.1 -5.08,-4.699 -3.182,-6.597 1.323,-6.597 8.083,0.162 10.364,0.162 11.472,1.271 11.472,3.895 10.378,4.989 D1.20
D_N: IC1.6 X5.A7 X5.B7 | length 18.8
  Top Layer w0.15: -0.223,6.078 -0.12,5.976 ; X5.B7 0.25,8.54 X5.A7 -0.5,6.355 -0.12,5.976 ; v1(9.906,1.651) 10.106,1.451 10.306,1.451 10.563,1.709 10.563,2.424 10.324,2.664 5.083,2.664 2.407,5.34 0.515,5.34 -0.12,5.976
  Bottom Layer w0.15: IC1.6@8.705,1.905 8.959,1.651 v1(9.906,1.651)
D_P: IC1.5 X5.A6 X5.B6 | length 22
  Top Layer w0.15: X5.B6 -0.25,9.52 0.23,10 v1(0.5,10) ; X5.A6 v1(0.5,6.985) 0.127,6.612 0.127,6.223 0.66,5.69 2.552,5.69 5.228,3.014 10.469,3.014 10.572,2.911 10.913,2.569 10.913,1.564 10.451,1.101 10.106,1.101 v1(9.906,0.901)
  Bottom Layer w0.15: v1(0.5,6.985) v1(0.5,10) ; IC1.5@8.705,0.635 8.971,0.901 v1(9.906,0.901)
Enable_U: D1.41 D3.1 TP5.1 | length 12
  Top Layer w0.15: D3.1 -7.455,1.754 -7.253,1.955 -5.475,1.955 -3.9,0.381 TP5.1 -2.637,0.381 -1.978,-0.278 -1.373,-0.278 v1(-0.762,-0.889) ; v1(1.016,0.127) 1.393,-0.25 D1.41
  Bottom Layer w0.15: v1(-0.762,-0.889) 0.254,0.127 v1(1.016,0.127)
Enable_V: D1.44 D3.2 TP7.1 | length 12.6
  Top Layer w0.15: D3.2 -7.855,1.934 -7.474,2.315 -4.728,2.315 TP7.1 -3.059,1.524 -1.678,0.143 -1.016,0.143 0.877,-1.75 D1.44
Enable_W: D1.43 D3.3 TP8.1 | length 13.1
  Top Layer w0.15: D3.3 -8.255,2.036 -7.615,2.676 -3.184,2.676 TP8.1 -2.125,1.778 0.903,-1.25 D1.43
GND: C1.1 C2.1 C4.1 C5.1 C6.1 C7.1 C8.1 C9.1 C10.1 C11.1 D1.9 D2.4 D2.5 D2.8 D3.8 D3.12 D3.15 D3.17 D3.25 IC1.1 R4.1 R6.1 R10.1 R11.1 R12.1 R16.1 R17.1 TP17.1 V2.5 V3.5 X1.2 X5.A1 X5.A12 X5.B1 X5.B12 X5.S | length 50
  Top Layer w0.15: TP17.1 -10.287,4.064 v1(-9.906,4.064) ; v1(-7.874,-5.969) R4.1 ; v1(-4.064,-1.143) R6.1
  Top Layer w0.2: v1(-10.922,-1.524) -10.605,-1.207 D3.12 -10.02,-0.8 D3.25@-9.22,0 ; v1(-10.922,1.524) -10.605,1.207 D3.8 -10.02,0.8 D3.25@-9.22,0 ; D3.15 -9.055,-0.4 D3.25 ; D3.17 -8.255,-0.4 D3.25 ; D3.25@-9.22,0 D3.25
  Top Layer w0.3: v1(-3.1,10) X5.B1 -3,9.04 X5.A12 ; X5.A1 3,9.04 X5.B12 v1(3.1,10) ; v1(5.588,-10.16) C7.1 ; v1(6.985,-10.16) C8.1 ; v1(9.525,-10.16) C9.1 ; D1.9 15.236,0.25 v1(15.24,0.254)
  Top Layer w0.4: C4.1 v1(-4.445,-3.175)
  Bottom Layer w0.15: R16.1 v1(0,12.685) R17.1
  Bottom Layer w0.2: v1(-9.906,4.064) R12.1 R11.1 ; D2.4 -0.762,1.905 v1(0,1.143) 0.762,1.905 D2.5 2.7,2.507 R10.1 ; v1(0.7,-4.699) C1.1 0.7,-3.587 2.382,-1.905 D2.8
  Bottom Layer w0.3: V3.5@-3,-6.812 v1(-3,-5.858) ; C5.1 -2.25,-9.587 -2.25,-8.537 v1(-1.27,-8.537) ; V2.5@3,-6.812 v1(3,-5.858) ; C6.1 3.7,-8.587 3.75,-8.537 4.56,-8.537 v1(4.572,-8.525) ; v1(7.239,-4.114) 7.797,-4.114 8.128,-4.445 IC1.1 8.825,-4.445 C11.1 C10.1
  other v1: -13.589,-6.477 -13.589,-5.461 -13.589,-4.445
I2C1_SCL: D1.62 TP18.1 | length 1.6
  Top Layer w0.15: TP18.1 10.878,-6.902 D1.62
I2C1_SDA: D1.63 TP19.1 | length 1.7
  Top Layer w0.15: D1.63 11.378,-6.679 TP19.1
I2C2_SCL: D1.30 D2.7 R2.1 TP1.1 | length 11.7
  Top Layer w0.15: v1(5.878,3.745) 5.878,4.169 5.378,4.669 D1.30 5.378,6.679 5.684,6.985 TP1.1
  Bottom Layer w0.15: D2.7 R2.1 5.077,0.047 5.077,2.944 v1(5.878,3.745)
I2C2_SDA: D1.31 D2.6 R3.1 TP3.1 | length 10
  Top Layer w0.15: v1(5.126,4.077) 4.878,4.325 D1.31 4.878,6.985 5.842,7.949 TP3.1
  Bottom Layer w0.15: D2.6 R3.1 4.395,3.347 v1(5.126,4.077)
Motor_U: D1.42 D3.4 TP9.1 | length 14.4
  Top Layer w0.15: D3.4 -8.63,1.45 -8.63,2.161 -7.759,3.032 -1.508,3.032 TP9.1 -0.889,1.168 1.029,-0.75 D1.42
Motor_V: D1.37 D3.5 TP10.1 | length 13.7
  Top Layer w0.15: D3.5 -9.03,1.45 -9.03,2.263 -7.905,3.388 0.301,3.388 TP10.1@0.301,3.197 ; TP10.1 0.5,2.503 1.253,1.75 1.939,1.75 D1.37
Motor_W: D1.36 D3.6 TP11.1 | length 15.3
  Top Layer w0.15: D3.6 -9.455,2.336 -7.984,3.807 -0.93,3.807 -0.274,4.463 TP11.1 1.303,3.905 1.303,2.608 1.661,2.25 D1.36
NetC3_1: C3.1 D3.14 | length 2
  Top Layer w0.2: C3.1 -9.455,-2.405 D3.14
NetC11_2: C11.2 IC1.4 | length 7
  Bottom Layer w0.15: IC1.4 9.779,-0.635 10.541,-1.397 10.541,-5.653 C11.2
NetIC1_2: IC1.2 R13.1 | length 3
  Bottom Layer w0.15: R13.1 7.747,-3.556 8.128,-3.175 IC1.2
NetIC1_3: IC1.3 R14.1 | length 4.8
  Bottom Layer w0.15: R14.1 5.284,-1.397 7.62,-1.397 8.128,-1.905 IC1.3
NetR16_2: R16.2 X5.B5 | length 2.7
  Top Layer w0.15: X5.B5 -0.75,9.879 v1(-0.474,10.155)
  Bottom Layer w0.15: R16.2 -1.5,11.181 v1(-0.474,10.155)
NetR17_2: R17.2 X5.A5 | length 5.7
  Top Layer w0.15: X5.A5 1,7.416 1.527,6.889 v1(1.661,6.889)
  Bottom Layer w0.15: R17.2 1.661,11.154 v1(1.661,6.889)
NetV2_1: V2.1 V3.3 | length 4.5
  Bottom Layer w0.15: V3.3 V2.1
NetV2_4: V2.4 V3.6 | length 4.5
  Bottom Layer w0.15: V3.6 V2.4
nFAULT: D1.48 D3.20 R5.1 TP13.1 | length 11.8
  Top Layer w0.15: D3.20 -6.482,-0.8 -5.832,-1.45 -5.281,-1.45 TP13.1 R5.1@-3.302,-4.495 ; R5.1@-3.352,-4.445 R5.1@-3.302,-4.495 ; D1.48 -2.149,-3.75 R5.1 R5.1@-3.302,-4.495
nRST: C9.2 D1.12 R15.2 TP16.1 | length 16.7
  Top Layer w0.15: R15.2 9.51,-7.951 C9.2 10.606,-9.017 TP16.1 12.7,-7.874 12.7,-3.429 11.938,-2.667 11.938,0.762 12.926,1.75 D1.12
nSLEEP: D1.47 D3.24 TP12.1 | length 15.9
  Top Layer w0.15: D3.24 -6.207,0.8 -5.822,1.185 -5.313,1.185 -3.805,-0.323 -2.77,-0.323 -2.417,-0.676 -2.417,-2.751 -1.918,-3.25 D1.47 3.12,-3.25 3.354,-3.484 3.354,-3.952 2.349,-4.957 TP12.1
Phase_A: D3.9 X2.1 | length 3.7
  Top Layer w0.2: v2(-13.405,2.5) -13.168,2.5 -11.068,0.4 D3.9
  other v2: -14.505,1.9 -13.405,1.9 -12.305,1.9 -14.505,2.5 -12.305,2.5 -14.505,3.1 -13.405,3.1 -12.305,3.1
Phase_B: D3.10 X3.1 | length 3.3
  Top Layer w0.2: v2(-13.905,0) D3.10
  other v2: -15.005,-0.6 -13.905,-0.6 -12.805,-0.6 -15.005,0 -12.805,0 -15.005,0.6 -13.905,0.6 -12.805,0.6
Phase_C: D3.11 X4.1 | length 3.7
  Top Layer w0.2: v2(-13.405,-2.5) -13.168,-2.5 -11.068,-0.4 D3.11
  other v2: -14.505,-3.1 -13.405,-3.1 -12.305,-3.1 -14.505,-2.5 -12.305,-2.5 -14.505,-1.9 -13.405,-1.9 -12.305,-1.9
SPI1_MISO: D1.55
SPI1_MOSI: D1.56 V2.6 | length 6.6
  Top Layer w0.15: v1(6.35,-4.445) 6.731,-4.826 7.747,-4.826 7.878,-4.957 D1.56
  Bottom Layer w0.15: V2.6 4.947,-6.737 6.35,-5.334 v1(6.35,-4.445)
SPI1_SCK: D1.57 V2.3 | length 6.1
  Top Layer w0.15: v1(7.975,-6.985) 8.001,-6.985 8.378,-6.608 D1.57
  Bottom Layer w0.15: V2.3 5.044,-7.637 5.236,-7.829 7.131,-7.829 v1(7.975,-6.985)
SWCLK-BOOT0: D1.46 R6.2 TP4.1 | length 5.5
  Top Layer w0.15: R6.2 -1.728,-2.463 -1.441,-2.75 D1.46
SWDIO: D1.45 TP2.1 | length 2.8
  Top Layer w0.15: TP2.1 0.25,-2.25 D1.45
USART1_RX: D1.61 R13.2 | length 10
  Top Layer w0.15: v1(4.378,-4.481) 6.573,-2.286 8.183,-2.286 10.378,-4.481 D1.61
  Bottom Layer w0.15: v1(4.378,-4.481) 4.395,-4.464 R13.2
USART1_TX: D1.60 R14.2 | length 6.2
  Top Layer w0.15: v1(7.239,-2.921) 8.1,-2.921 9.878,-4.699 9.878,-5.282 D1.60
  Bottom Layer w0.15: R14.2 6.604,-2.286 v1(7.239,-2.921)
VIN: C2.2 C3.2 D3.7 D3.13 D3.16 J1.1 R1.2 TP6.1 X1.1 | length 9.3
  Top Layer w0.15: TP6.1 -9.906,6.309 v1(-9.906,5.715) ; v1(-8.763,-4.445) -7.289,-4.445 R1.2 ; v1(-8.714,-2.287) v1@-8.655,-2.228
  Top Layer w0.2: v1(-10.392,-2.1) -9.855,-1.563 D3.13 ; v1(-10.392,2.1) -9.855,1.563 D3.7 ; C3.2 -8.825,-2.397 v1(-8.714,-2.287) ; v1@-8.655,-2.228 D3.16
  Top Layer w0.5: v1(-9.906,5.715) v1(-9.017,5.715) J1.1
  other v1: -8.763,-6.477 -8.763,-5.461
VUSB: V1.1 X5.A4 X5.A9 X5.B4 X5.B9 | length 10.6
  Top Layer w0.3: V1.1 -1.5,6.577 X5.A9 -1.5,8.331 -1.25,8.581 X5.B4 -1.25,10.306 -0.645,10.911 0.519,10.911 1.25,10.18 X5.B9 1.25,8.581 1.5,8.331 X5.A4
pads on no net: D1.1 D1.2 D1.3 D1.4 D1.5 D1.10 D1.11 D1.13 D1.14 D1.15 D1.16 D1.22 D1.23 D1.24 D1.25 D1.26 D1.27 D1.28 D1.29 D1.32 D1.33 D1.34 D1.35 D1.38 D1.39 D1.40 D1.49 D1.50 D1.51 D1.52 D1.53 D1.54 D1.58 D1.59 D1.64 D3.19 IC1.7 IC1.8 IC1.9 IC1.10 IC1.11 IC1.12 IC1.13 IC1.14 IC1.15 V3.1 V3.4 X5.A2 X5.A3 X5.A8 X5.A10 X5.A11 X5.B2 X5.B3 X5.B8 X5.B10 X5.B11

## Polygon pours and split planes (outlines as drawn)
+3V3 on MidLayer2 "+3V3_L03_P001" (solid, pour order 1): -7.62,-16.51 16.51,-16.51 16.51,15.875 -7.62,15.875
VIN on MidLayer2 "VIN_L03_P002" (solid, pour order 2): -7.62,15.875 -7.62,-16.51 -16.51,-16.51 -16.51,15.875
VIN on Top Layer "VIN_L01_P004" (solid, pour order 4): -9.525,-6.604 -9.271,-6.858 -8.509,-6.858 -8.382,-6.731 -8.382,-3.683 -8.509,-3.556 -9.144,-3.556 -9.525,-3.937
GND on Top Layer "GND_L01_P003" (solid, pour order 3): -12.827,-4.318 -13.081,-4.064 -13.843,-4.064 -13.97,-4.191 -13.97,-6.731 -13.843,-6.858 -13.081,-6.858 -12.827,-6.604
GND on MidLayer1 "GND_L02_P000" (solid, pour order 0): -17.145,16.51 -17.145,-16.51 17.145,-16.51 17.145,16.51

## Silkscreen, mask and mechanical layers (free items; w line width, h text height)
Top Overlay:
  drawing of 3 lines, arcs and shapes, not listed
  text "SDA" at 5.08,8.634 h1.2
  text "5V" at -9.144,7.116 h1.2
  text "VIN" at -13.081,6.856 h1.2
  text "SCL" at 7.62,6.602 h1.2
  text "GND" at -14.224,4.824 h1.2
  text "W" at -0.508,4.697 h1.2
  text "V" at -0.508,3.3 h1.2
  text "U" at -11.684,2.163 h1.2
  text "U" at -0.381,2.036 h1.2
  text "V" at -12.192,-0.383 h1.2
  text "SD" at 0.254,-2.161 h1.2
  text "W" at -11.684,-2.923 h1.2
  text "SC" at -1.143,-2.923 h1.2
  text "3V3" at 2.286,-6.855 h1.2
  text "Knobber" at -8.636,-8.115 h1.2
  text "L. Barbisch" at -7.62,-9.131 h1.2
  text "24.03.2024" at -6.096,-10.147 h1.2
  text "nRST" at 9.923,-11.955 h1.2 r45
Bottom Overlay:
  text "VIN" at -11.176,-7.112 h1.2 r45
  text "GND" at -6.613,-11.675 h1.2 r45
Board:
  the board outline again, w0.1
Mech_Add:
  circle w0.1: c-9,10 r3
  circle w0.1: c9,10 r3
  circle w0.1: c0,-13 r3
Drill Drawing:
  drawing of 387 lines, arcs and shapes, not listed
  text "Layer" at 6.055,-38.061 h1.48
  text "Name" at 12.26,-38.061 h1.48
  text "Material" at 24.254,-38.061 h1.48
  text "Thickness" at 35.035,-38.061 h1.48
  text "Constant" at 43.89,-38.061 h1.48
  text "Gerber" at 52.089,-38.061 h1.48
  text "Board Layer Stack" at 59.13,-38.061 h1.48
  text "Symbol" at -107.827,-38.762 h1.83
  text "Count" at -100.203,-38.762 h1.83
  text "Hole Size" at -93.325,-38.762 h1.83
  text "Hole Length" at -78.325,-38.762 h1.83
  text "Plated" at -64.065,-38.762 h1.83
  text "Hole Type" at -57.492,-38.762 h1.83
  text "Drill Layer Pair" at -47.973,-38.762 h1.83
  text "Via/Pad" at -29.62,-38.762 h1.83
  text "Pad Shape" at -21.928,-38.762 h1.83
  text "Top Overlay" at 12.26,-41.029 h1.48
  text "GTO" at 52.089,-41.029 h1.48
  text "61" at -100.203,-41.913 h1.52
  text "0.300mm (11.81mil)" at -93.325,-41.913 h1.52
  text "-" at -78.325,-41.913 h1.52
  text "PTH" at -64.065,-41.913 h1.52
  text "Round" at -57.492,-41.913 h1.52
  text "Top Layer - Bottom Layer" at -47.973,-41.913 h1.52
  text "Via" at -29.62,-41.913 h1.52
  text "Rounded" at -21.928,-41.913 h1.52
  text "Top Solder" at 12.26,-43.997 h1.48
  text "Solder Resist" at 24.254,-43.997 h1.48
  text "0.010mm" at 35.035,-43.997 h1.48
  text "3.5" at 43.89,-43.997 h1.48
  text "GTS" at 52.089,-43.997 h1.48
  text "2" at -100.203,-45.063 h1.52
  text "0.600mm (23.62mil)" at -93.325,-45.063 h1.52
  text "1.600mm (62.99mil)" at -78.325,-45.063 h1.52
  text "PTH" at -64.065,-45.063 h1.52
  text "Slot" at -57.492,-45.063 h1.52
  text "Top Layer - Bottom Layer" at -47.973,-45.063 h1.52
  text "Pad" at -29.62,-45.063 h1.52
  text "Rounded" at -21.928,-45.063 h1.52
  text "1" at 6.055,-46.965 h1.48
  text "Top Layer" at 12.26,-46.965 h1.48
  text "0.035mm" at 35.035,-46.965 h1.48
  text "GTL" at 52.089,-46.965 h1.48
  text "2" at -100.203,-48.213 h1.52
  text "0.600mm (23.62mil)" at -93.325,-48.213 h1.52
  text "2.100mm (82.68mil)" at -78.325,-48.213 h1.52
  text "PTH" at -64.065,-48.213 h1.52
  text "Slot" at -57.492,-48.213 h1.52
  text "Top Layer - Bottom Layer" at -47.973,-48.213 h1.52
  text "Pad" at -29.62,-48.213 h1.52
  text "Rounded" at -21.928,-48.213 h1.52
  text "Dielectric1" at 12.26,-49.933 h1.48
  text "FR-4 (7628)" at 24.254,-49.933 h1.48
  text "0.180mm" at 35.035,-49.933 h1.48
  text "4.2" at 43.89,-49.933 h1.48
  text "2" at -100.203,-51.363 h1.52
  text "1.100mm (43.31mil)" at -93.325,-51.363 h1.52
  text "-" at -78.325,-51.363 h1.52
  text "PTH" at -64.065,-51.363 h1.52
  text "Round" at -57.492,-51.363 h1.52
  text "Top Layer - Bottom Layer" at -47.973,-51.363 h1.52
  text "Pad" at -29.62,-51.363 h1.52
  text "(Mixed)" at -21.928,-51.363 h1.52
  text "Dielectric 2" at 12.26,-52.901 h1.48
  text "FR-4 (7628)" at 24.254,-52.901 h1.48
  text "0.180mm" at 35.035,-52.901 h1.48
  text "4.2" at 43.89,-52.901 h1.48
  text "3" at -100.203,-54.514 h1.52
  text "3.000mm (118.11mil)" at -93.325,-54.514 h1.52
  text "-" at -78.325,-54.514 h1.52
  text "NPTH" at -64.065,-54.514 h1.52
  text "Round" at -57.492,-54.514 h1.52
  text "Top Layer - Bottom Layer" at -47.973,-54.514 h1.52
  text "Pad" at -29.62,-54.514 h1.52
  text "Rounded" at -21.928,-54.514 h1.52
  text "2" at 6.053,-55.869 h1.48
  text "MidLayer1" at 12.26,-55.869 h1.48
  text "0.035mm" at 35.035,-55.869 h1.48
  text "G1" at 52.089,-55.869 h1.48
  text "70 Total" at -100.203,-57.664 h1.52
  text "Core" at 12.26,-58.837 h1.48
  text "0.710mm" at 35.035,-58.837 h1.48
  text "4.2" at 43.89,-58.837 h1.48
  text "Slot definitions :" at -107.827,-59.869 h1.52
  text "Routed Path Length" at -96.412,-59.869 h1.52
  text "= Calculated from tool start centre position to tool end centre position." at -82.737,-59.869 h1.52
  text "Hole Length" at -96.412,-61.129 h1.52
  text "= Routed Path Length + Tool Size = Slot length as defined in the PCB layout" at -87.8,-61.129 h1.52
  text "3" at 6.055,-61.805 h1.48
  text "MidLayer2" at 12.26,-61.805 h1.48
  text "0.035mm" at 35.035,-61.805 h1.48
  text "G2" at 52.089,-61.805 h1.48
  text "Dielectric 3" at 12.26,-64.773 h1.48
  text "FR-4 (7628)" at 24.254,-64.773 h1.48
  text "0.180mm" at 35.035,-64.773 h1.48
  text "4.2" at 43.89,-64.773 h1.48
  text "Dielectric 4" at 12.26,-67.741 h1.48
  text "FR-4 (7628)" at 24.254,-67.741 h1.48
  text "0.180mm" at 35.035,-67.741 h1.48
  text "4.2" at 43.89,-67.741 h1.48
  text "4" at 6.055,-70.709 h1.48
  text "Bottom Layer" at 12.26,-70.709 h1.48
  text "0.035mm" at 35.035,-70.709 h1.48
  text "GBL" at 52.089,-70.709 h1.48
  text "Bottom Solder" at 12.26,-73.678 h1.48
  text "Solder Resist" at 24.254,-73.678 h1.48
  text "0.010mm" at 35.035,-73.678 h1.48
  text "3.5" at 43.89,-73.678 h1.48
  text "GBS" at 52.089,-73.678 h1.48
  text "Bottom Overlay" at 12.26,-76.646 h1.48
  text "GBO" at 52.089,-76.646 h1.48
  text "Total board thickness:" at 6.055,-79.614 h1.48
  text "1.590mm" at 35.035,-79.614 h1.48